# Altium PCB PICO_Project_1.PcbDoc
Units mil, origin at the board's own origin, x right, y up, seen from the top; angles counter-clockwise.
Board outline 2395 x 2685 mil, 2 copper layers (Top Layer, Bottom Layer); 7 components, 8 nets, 57 pads, 0 vias.
Unrouted connection lines stored in the file: 3.
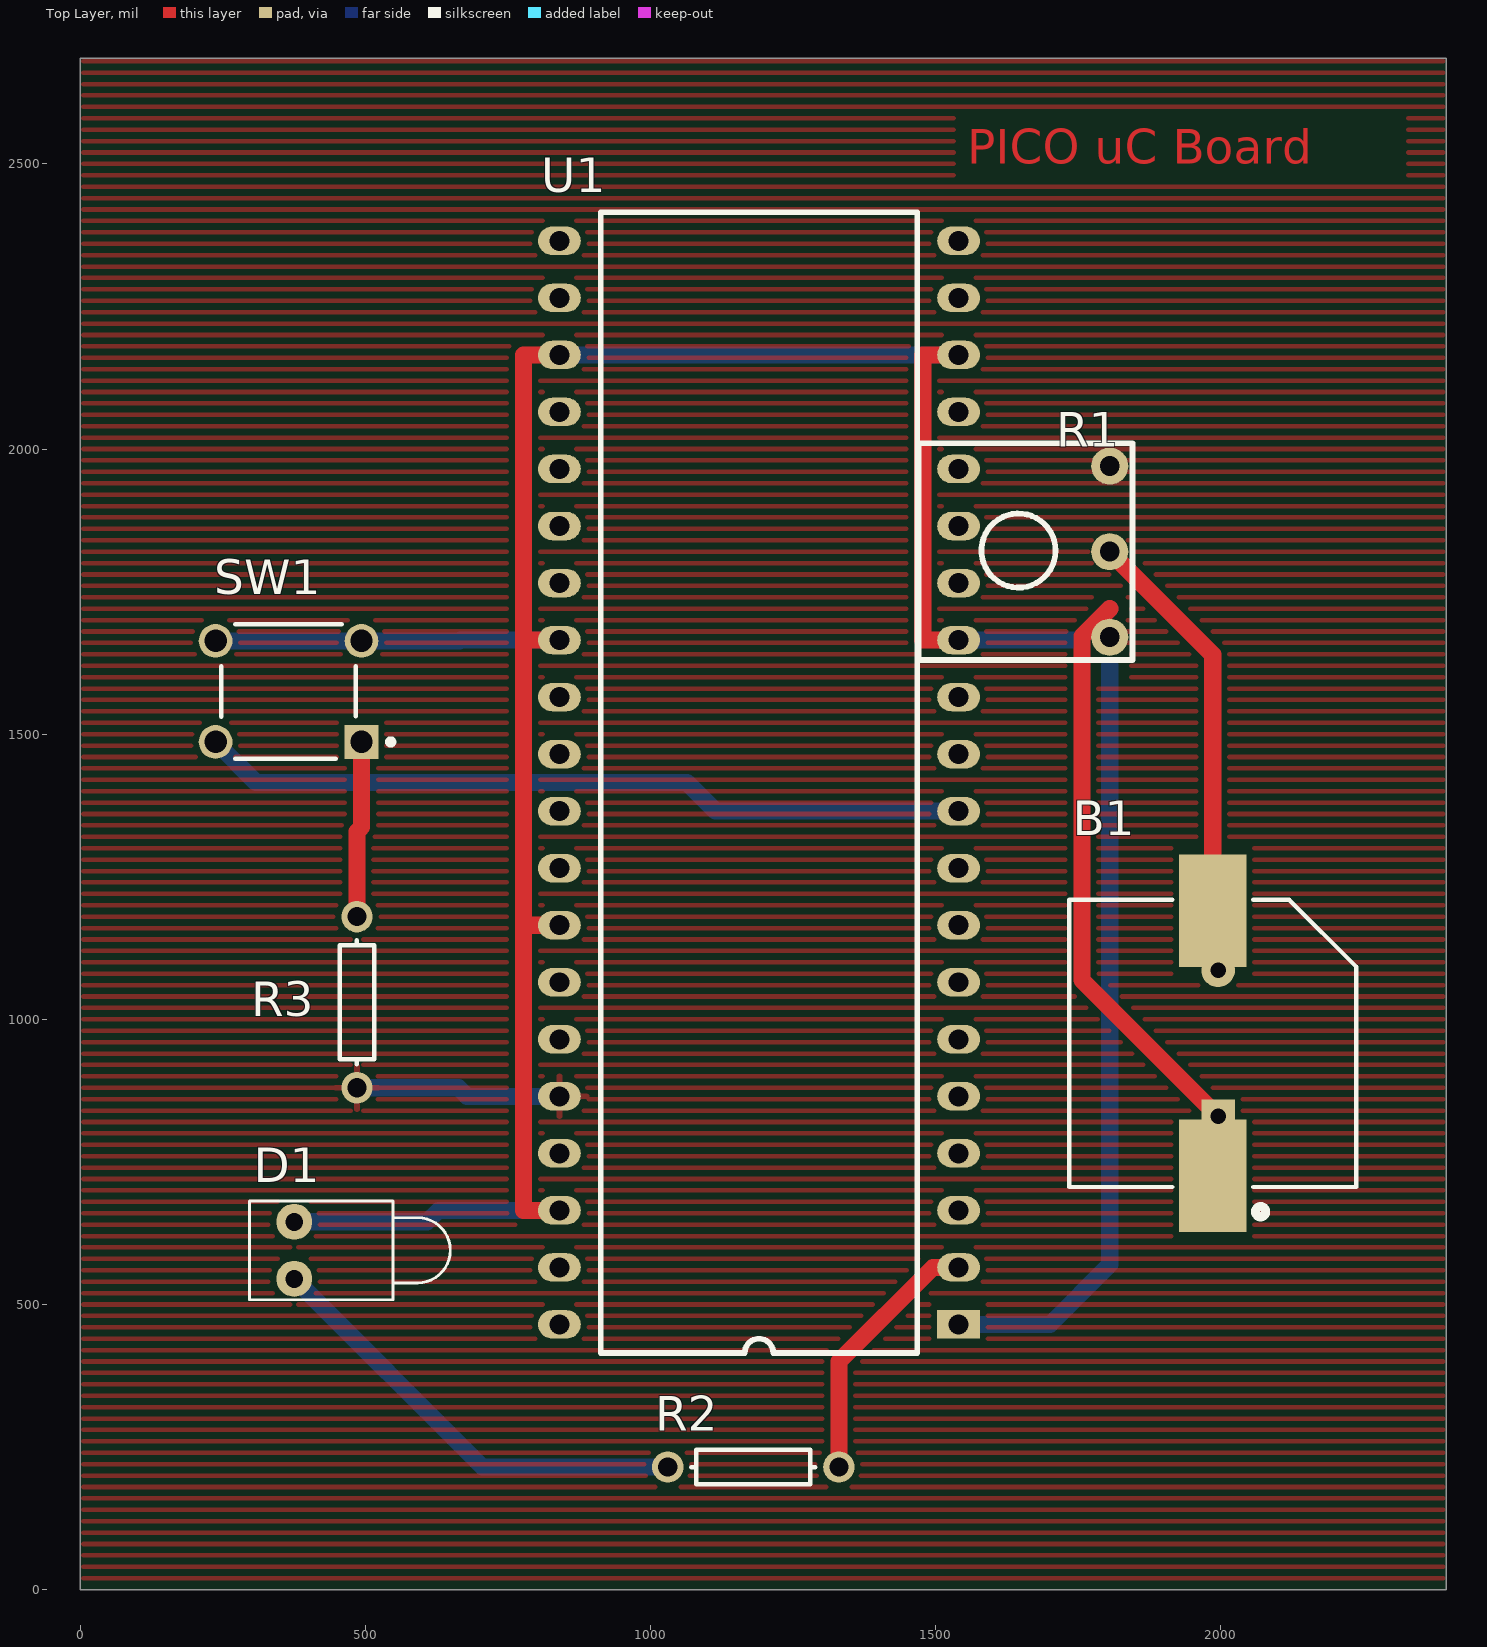
[diagram p0: Top Layer view]
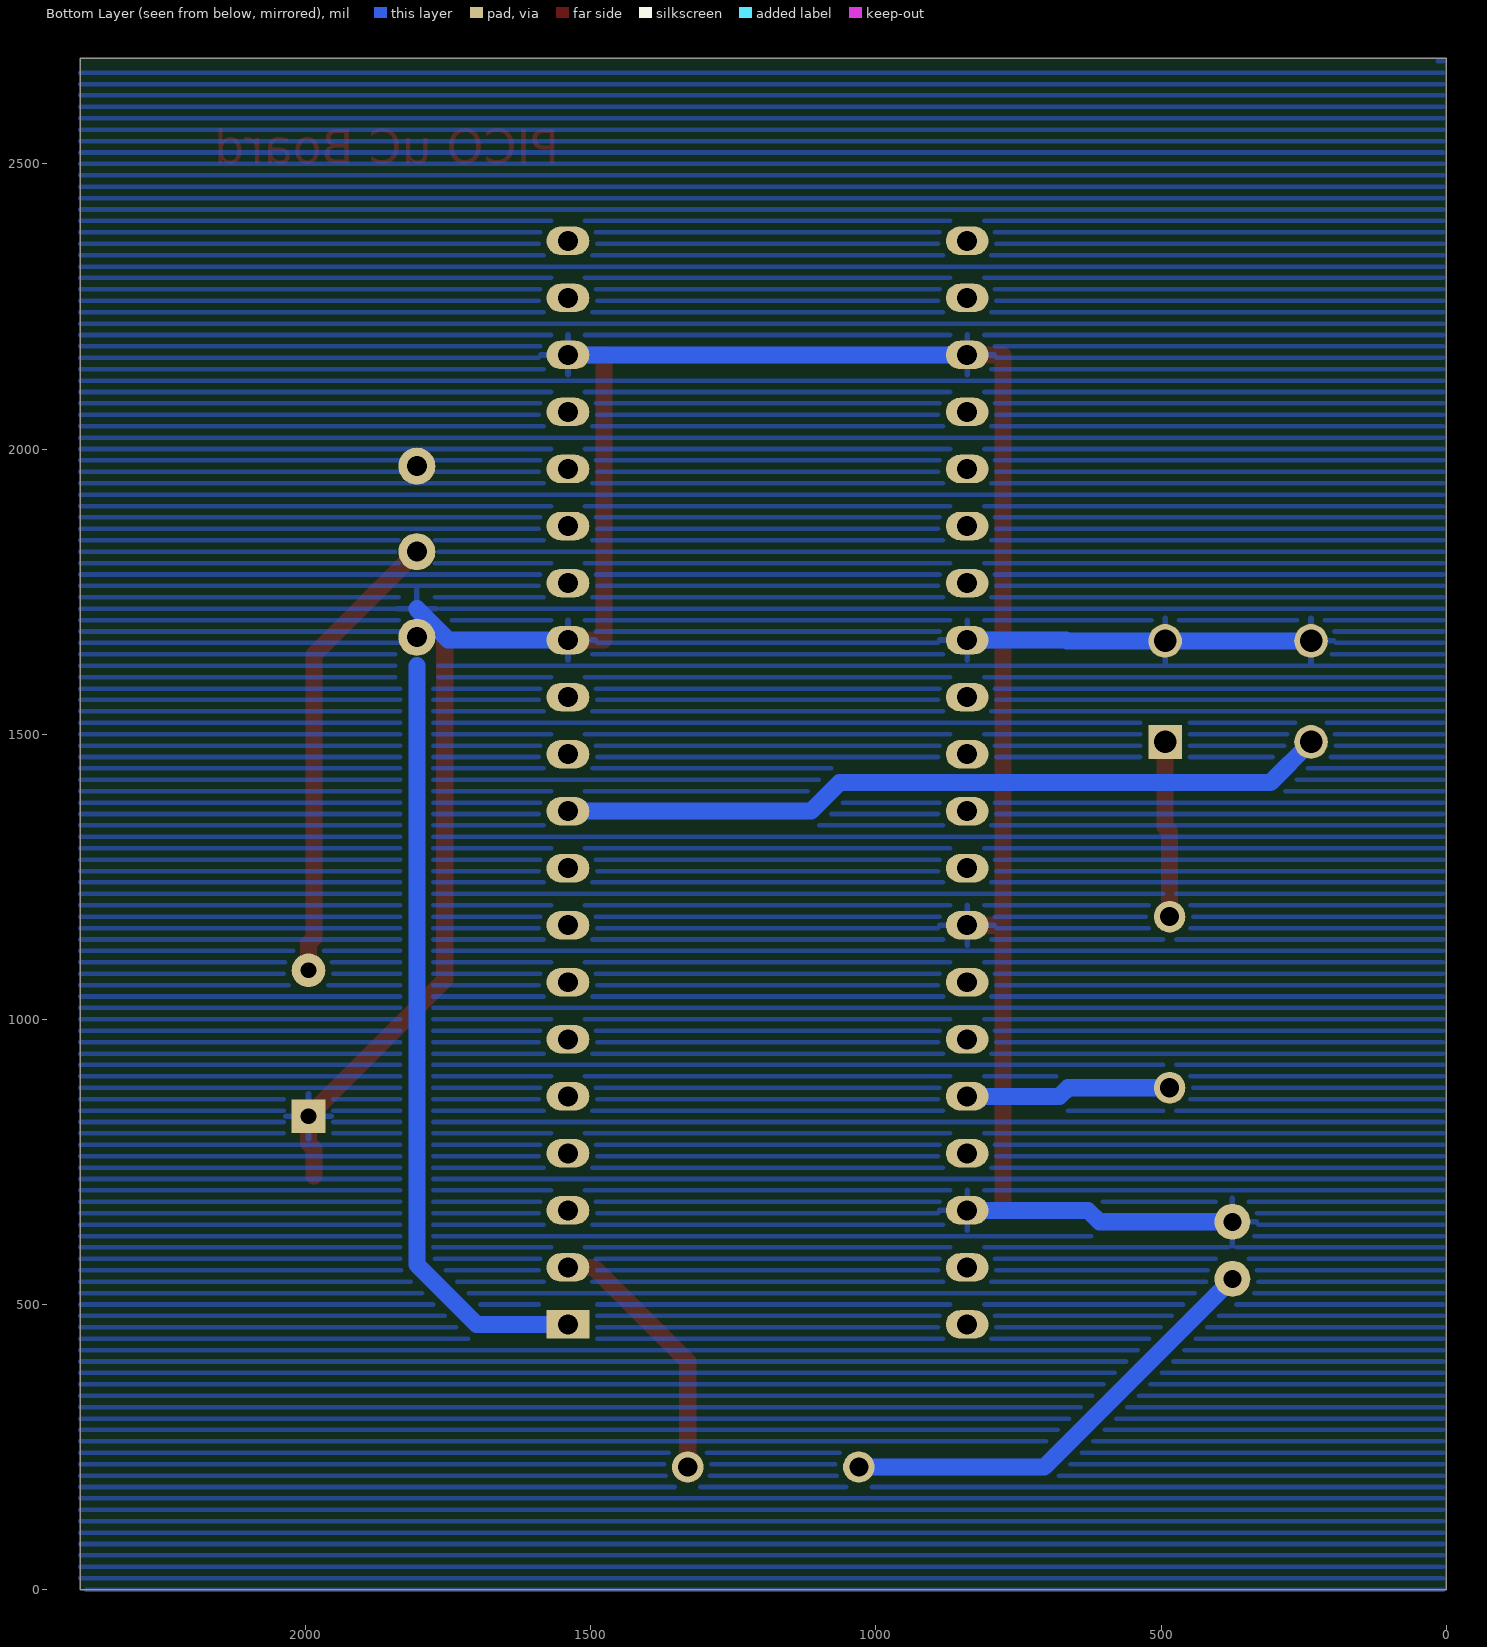
[diagram p1: Bottom Layer view, seen from below]

## Layer stack, top to bottom
Top Solder: solder mask 0.4, Solder Resist, Dk 3.5
Top Layer: signal copper 1.4
Dielectric 1: dielectric 12.6, FR-4, Dk 4.8
Bottom Layer: signal copper 1.4
Bottom Solder: solder mask 0.4, Solder Resist, Dk 3.5

## Board outline
0,0 2395,0 2395,2685 0,2685

## Design rules (kind name [scope] priority, off if disabled: settings)
Clearance [All] p1: gap=10 ignorepadtopadclearanceinfootprint=FALSE
PolygonConnect [All] p1: connectstyle=Relief reliefconductorwidth=10 reliefentries=4 polygonreliefangle="90 Angle" airgapwidth=10
RoutingVias [All] p1: holewidth=28 width=50 viastyle="Through Hole" minholewidth=28 minwidth=50 maxholewidth=28 maxwidth=50
SolderMaskExpansion [All] p1: expansion=4 istentingtop=FALSE
Width Width_1 [All] p1: maxlimit=30 minlimit=30 preferedwidth=30
Width [All] p2: maxlimit=10 minlimit=10 preferedwidth=10
30 further rules are at their usual default settings.

## Components (designator, comment, footprint, x,y, rotation, side; value= is the part's Value field where it differs from the comment)
B1 "Buzzer" ABSM-1574 1985.55,725.67 r90 top
D1 "LED1" LED-1 375,595 r0 top
R1 "RPot_1" "POT inline wide" 1805,1720 r90 top value=10K
R2 "Res1" AXIAL-0.3 1180,215 r180 top value=100
R3 "Res1" AXIAL-0.3 485,1030 r270 top value=2.2K
SW1 "B3F-1000" OMRON-B3F-1000-4_V 365,1575 r180 top
U1 "Raspberry Pi Pico" "Raspberry Pi Pico" 1540,465 r180 top

## Footprints (in the part's own frame and the unit in brackets; to place one, negate y for a bottom-side part, rotate by r counter-clockwise, add the part's x,y. Pads: shape width x height; smd on the part's side, far side on the other; paste and mask are expansions set on the pad)
ABSM-1574 [mm] "Magnetic Transducer Buzzer"
  rect 5x3 smd: 1(0,0) 2(11.8,0)
  rect 1.5x1.5 hole 0.7: 1A(2.65,-0.24)
  round 1.5 hole 0.7: 2A(9.15,-0.24)
  silkscreen extent -1.83,-6.4 12.3,6.4
AXIAL-0.3 [mm] "Axial Device, Thru-Hole; 2 Leads; 0.3 in Pin Spacing"
  round 1.4 hole 0.85: 1(-3.81,0) 2(3.81,0)
  silkscreen extent -2.77,-0.76 2.77,0.76
LED-1 [mm] "LED; 2 Leads"
  round 1.6 hole 0.8: 1(0,1.27) 2(0,-1.27)
  silkscreen extent -2,-2.2 6.95,2.2
OMRON-B3F-1000-4_V [mm] "TH, 4-Leads, Body 6x6mm"
  rect 1.5x1.5 hole 1 paste-2539.97: 1(-3.25,2.25)
  round 1.5 hole 1 paste-2539.97: 2(3.25,2.25) 4(3.25,-2.25)
  round 1.5 hole 1 paste-2539.97 mask+0.102: 3(-3.25,-2.25)
  silkscreen extent -4.68,-3 3,3, body extent -3,-3 3,3, height 4.5
"POT inline wide" [mil]
  round 65 hole 35: 1(-50,0) 2(100,0) 3(250,0)
  silkscreen extent -90,-40 290,335
"Raspberry Pi Pico" [mil]
  rect 75x50 hole 35: 1(0,0)
  oval 75x50 hole 35: 2(0,-100) 3(0,-200) 4(0,-300) 5(0,-400) 6(0,-500) 7(0,-600) 8(0,-700) 9(0,-800) 10(0,-900) 11(0,-1000) 12(0,-1100) 13(0,-1200) 14(0,-1300) 15(0,-1400) 16(0,-1500) 17(0,-1600) 18(0,-1700) 19(0,-1800) 20(0,-1900) 21(700,-1900) 22(700,-1800) 23(700,-1700) 24(700,-1600) 25(700,-1500) 26(700,-1400) 27(700,-1300) 28(700,-1200) 29(700,-1100) 30(700,-1000) 31(700,-900) 32(700,-800) 33(700,-700) 34(700,-600) 35(700,-500) 36(700,-400) 37(700,-300) 38(700,-200) 39(700,-100) 40(700,0)
  silkscreen extent 72,-1950 628,50

## Part data
B1: "Magnetic Transducer Buzzer", ComponentLink1Description="Manufacturer Link", ComponentLink1URL=http://www.megastar.com/linecard/buzzmode/index.php, DatasheetVersion=17-Dec-2003, LatestRevisionDate=17-Dec-2003, LatestRevisionNote="Schematic revised, PCB Footprint replaced.", PackageDescription="Magnetic Transducer Buzzer", PackageReference=ABSM-1574, Published=24-Mar-1999, Publisher="Altium Limited"
D1: "Typical RED GaAs LED", LatestRevisionDate=08-Jul-2005, LatestRevisionNote="Mech Layer 1 removed.", PackageDescription="LED; 2 Leads", PackageReference=LED-1, Published=8-Jun-2000, Publisher="Altium Limited"
R1: library part RPot_3, "Potentiometer", LatestRevisionDate=17-Jul-2002, LatestRevisionNote="Re-released for DXP Platform.", PackageDescription="Variable Resistor, Thru-Hole; 3 Leads", PackageReference=VR5, Published=8-Jun-2000, Publisher="Altium Limited", Set Position=0.5, Sim Note="Enter the Resistance value and the set point into parameter fields."
R2 R3: "Resistor", LatestRevisionDate=17-Jul-2002, LatestRevisionNote="Re-released for DXP Platform.", PackageDescription="Axial Device, Thru-Hole; 2 Leads; 0.3 in Pin Spacing", PackageReference=AXIAL-0.3, Published=8-Jun-2000, Publisher="Altium Limited"
SW1: library part CMP-1677-00002-1, "Tactile Switch, SPST-NO, 0.05 A, 5 to 24 V, -25 to 70 degC, 4-Pin THD, RoHS, Bulk", Capacitance="-45 f", Current Rating="1.5 A", Max Operating Temperature="70 degC", Min Operating Temperature="-40 degC", Package Quantity=1080, Voltage Rating="150 V", ComponentLink1Description="Manufacturer URL", ComponentLink1URL=http://www.omron.com/, ComponentLink2Description=Datasheet, ComponentLink2URL=http://www.omron.com/ecb/products/pdf/en-b3f.pdf, Contact Material=Brass, Contact Plating=Gold, DatasheetVersion=Jan-15, Gender=Female, Height="14.99 mm", Lead Pitch="1.27 mm", Length="18.34 mm", Mount="Through Hole", PackageDescription="4-Pin Through Hole Device, Body 6 x 6 mm", PackageReference=B3F-1000, Packaging=Tray, Pins=8, Radiation Hardening=No, RoHSCompliant=true, Shielding=Shielded, Width="25.4 mm"

## Nets (pads, with @x,y where several pads share a name; then routed paths per layer and width w, separated by ;. In a path a pad name is that pad's centre, name@x,y a point inside that pad or via, vN(x,y) a via of type N, cw(c..) or ccw(c..) an arc to the next point about the centre after c; other vN are vias at no path point)
GND: B1.1 B1.1A D1.2 R1.3 SW1.3 SW1.4 U1.13 U1.18 U1.23 U1.28 U1.33 U1.38 | length 5560.1
  Top Layer w30: U1.38 777,665 777,1165 ; U1.33 777,1165 ; U1.28 777,1665 ; U1.23 777,2165 777,1665 ; U1.13 1477,1665 1477,2165 U1.18 ; 1805,1720 1756,1671 1756,1069 B1.1A 1995,782.45 1985.55,773 B1.1 ; 777,1165 777,1665
  Bottom Layer w30: SW1.4 SW1.3 665,1663.58 666.42,1665 U1.28 ; 375,645 608,645 628,665 U1.38 ; U1.23 U1.18 ; U1.13 1750,1665 1805,1720
LED_IN: D1.1 R2.2 | length 791.7
  Bottom Layer w30: 375,545 705,215 R2.2
NetB1_2: B1.2 B1.2A R1.2 | length 812.8
  Top Layer w30: R1.2 1985.55,1639.45 B1.2 1985.55,1142.45 1995,1133 B1.2A
NetR2_1: R2.1 U1.2 | length 463.3
  Top Layer w30: R2.1 1330,400 1495,565 U1.2
NetR3_1: R3.1 SW1.1 | length 309.7
  Top Layer w30: R3.1 485,1329 492.95,1336.95 SW1.1
NetSW1_2: SW1.2 U1.10 | length 1353.2
  Bottom Layer w30: SW1.2 308.47,1415 1064,1415 1114,1365 U1.10
PIEZO_IN: R1.1 U1.1 | length 1358.5
  Bottom Layer w30: U1.1 1700,465 1805,570 1805,1620
V3.3: R3.2 U1.36 | length 361.2
  Bottom Layer w30: R3.2 663,880 678,865 U1.36
pads on no net: U1.3 U1.4 U1.5 U1.6 U1.7 U1.8 U1.9 U1.11 U1.12 U1.14 U1.15 U1.16 U1.17 U1.19 U1.20 U1.21 U1.22 U1.24 U1.25 U1.26 U1.27 U1.29 U1.30 U1.31 U1.32 U1.34 U1.35 U1.37 U1.39 U1.40

## Polygon pours and split planes (outlines as drawn)
V3.3 on Top Layer "V3.3_L01_P000" (hatched Horizontal grid 20 track 8, pour order 0): 0,0 5,5 5,2685 2395,2685 2390,2680 2390,5
GND on Bottom Layer "GND_L02_P001" (hatched Horizontal grid 20 track 8, pour order 1): 5,0 5,2680 10,2685 15,2680 2395,2680 2395,10 2385,0

## Other copper
Top Layer:
  text "PICO uC Board" at 1555,2500 h60